# EAGLE board IntegratedSensor (EAGLE 6.3)
MenloSensor1
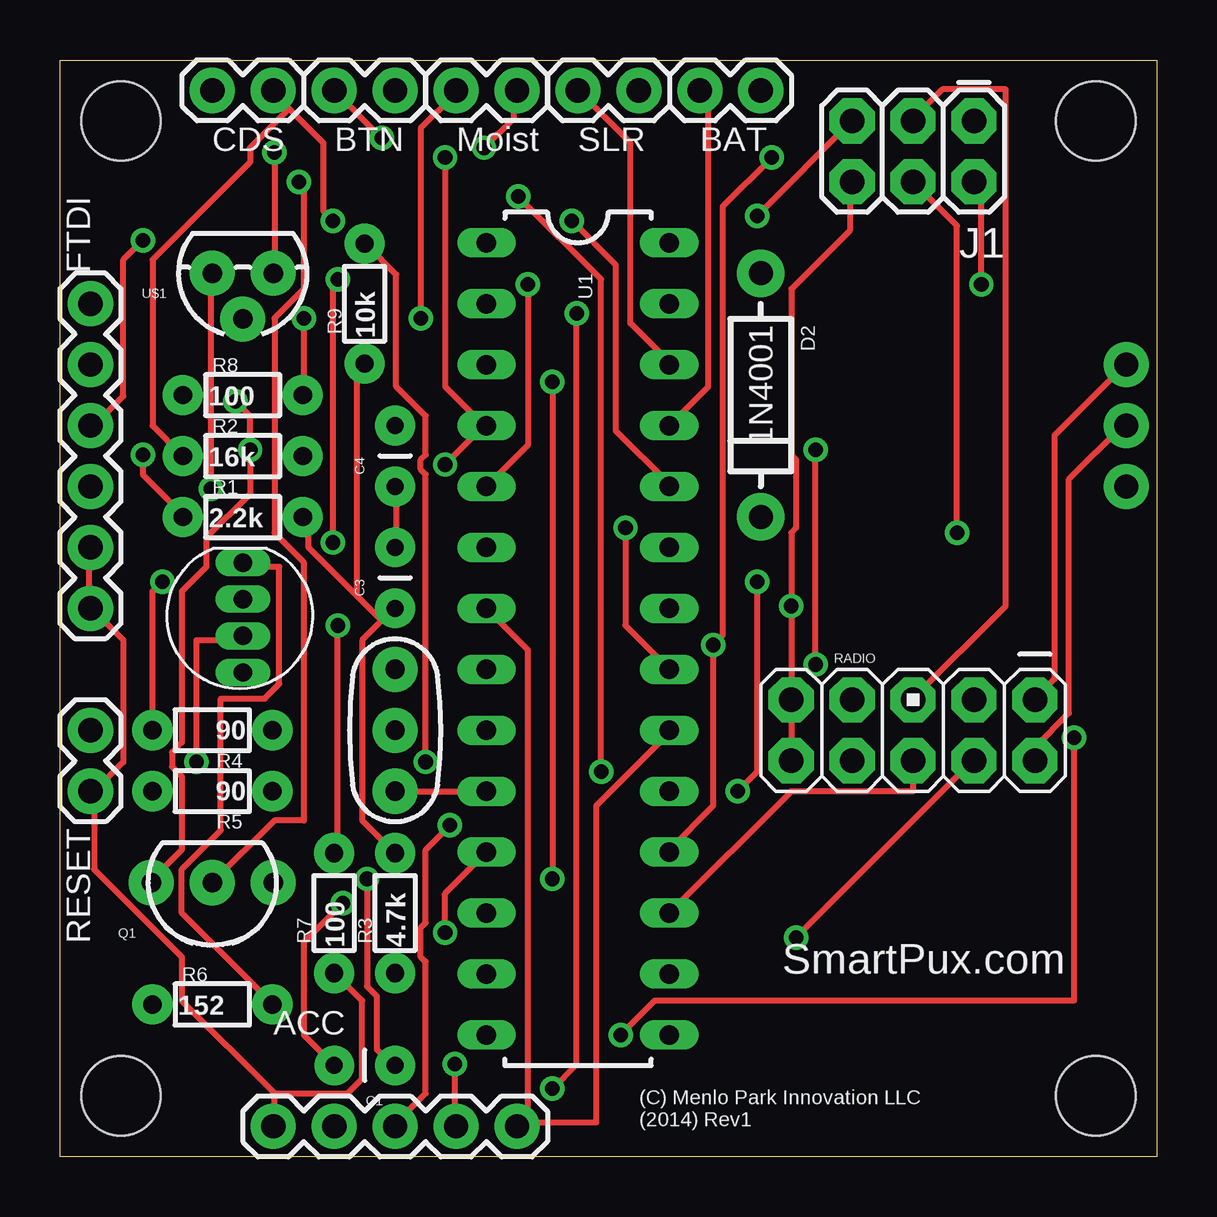
[diagram p0: board, top side]
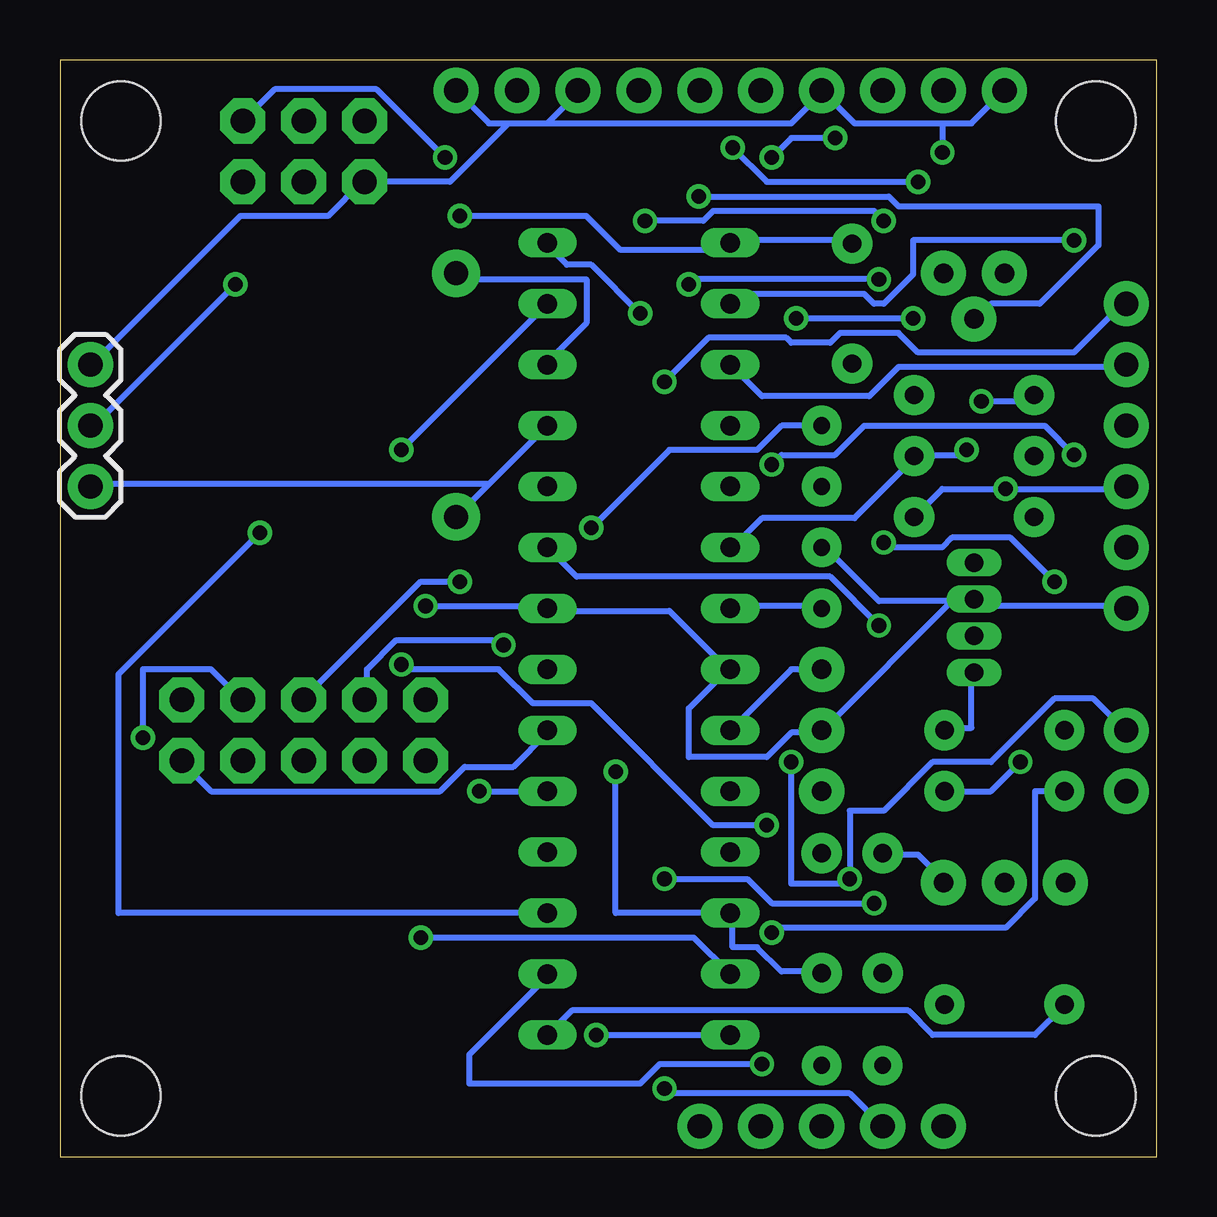
[diagram p1: board, bottom side, seen from below]

Size 45.72 x 45.72 mm. Coordinates in mm from the lower left corner, seen from the top.
Outline: 0,0 0,45.72 45.72,45.72 45.72,0 0,0
Copper layers (1*16): Top 0.035mm / dielectric 1.5mm / Bottom 0.035mm
Design rules "default *": minimum track width 10mil, minimum drill 24mil, track to track 8mil, track to pad 8mil, pad to pad 8mil, via to via 8mil, smd to smd 8mil, copper to edge 40mil, drill to drill 8mil, minimum pad ring 0mil, minimum via ring 8mil, stop-mask expansion 4mil, vias tented up to drill 0mil, thermal gap 10mil

## Footprints (pad centres in the part's own frame; a part is rotated, then mirrored left to right if it is on the bottom)
1X05 = drill 1.016 pad 1.88: 1 0,0; 2 2.54,0; 3 5.08,0; 4 7.62,0; 5 10.16,0
1X02 = drill 1.016 pad 1.88: 1 0,0; 2 2.54,0
CAP-PTH-SMALL = drill 0.7 pad 1.651: 1 0,0; 2 2.54,0
1X03 = drill 1.016 pad 1.88: 1 0,0; 2 2.54,0; 3 5.08,0
LED-RGB-THRU = drill 0.762 pad 0.889 long: 1 1.905,0; 2 0.381,0; 3 -1.143,0; 4 -2.667,0
DIODE-1N4001 = drill 1 pad 1.981: A -5.08,0; C 5.08,0
1X06 = drill 1.016 pad 1.88: 1 0,0; 2 2.54,0; 3 5.08,0; 4 7.62,0; 5 10.16,0; 6 12.7,0
2X3 = drill 1.016 pad 1.88 octagon: 1 0,0; 2 0,2.54; 3 2.54,0; 4 2.54,2.54; 5 5.08,0; 6 5.08,2.54
TO-92-AMMO = drill 0.813 pad 1.88: 1 -2.54,0; 2 0,0; 3 2.54,0
1/6W-RES = drill 0.762 pad 1.676: 1 -2.5,0; 2 2.5,0
AVR_ICSP = drill 1.016 pad 1.88 octagon: 1 -1.27,5.08; 2 1.27,5.08; 3 -1.27,2.54; 4 1.27,2.54; 5 -1.27,0; 6 1.27,0; 7 -1.27,-2.54; 8 1.27,-2.54; 9 -1.27,-5.08; 10 1.27,-5.08
STAND-OFF = hole 3.302: 0,0
DIL28-3 = drill 0.813 long: 1 -16.51,-3.81; 2 -13.97,-3.81; 3 -11.43,-3.81; 4 -8.89,-3.81; 5 -6.35,-3.81; 6 -3.81,-3.81; 7 -1.27,-3.81; 8 1.27,-3.81; 9 3.81,-3.81; 10 6.35,-3.81; 11 8.89,-3.81; 12 11.43,-3.81; 13 13.97,-3.81; 14 16.51,-3.81; 15 16.51,3.81; 16 13.97,3.81; 17 11.43,3.81; 18 8.89,3.81; 19 6.35,3.81; 20 3.81,3.81; 21 1.27,3.81; 22 -1.27,3.81; 23 -3.81,3.81; 24 -6.35,3.81; 25 -8.89,3.81; 26 -11.43,3.81; 27 -13.97,3.81; 28 -16.51,3.81
TO-92 = drill 0.813 pad 1.88: 1 -1.27,0; 2 0,1.905; 3 1.27,0
RESONATOR-PTH = drill 0.8 pad 1.88: 1 -2.54,0; 2 0,0; 3 2.54,0

## Placement (x,y rotation side)
ACC  [1X05]  8.89,1.27 0 top
BAT  [1X02]  26.67,44.45 0 top
BTN  [1X02]  11.43,44.45 0 top
C1  0.1uf  [CAP-PTH-SMALL]  13.97,3.81 180 top
C3  0.1uf  [CAP-PTH-SMALL]  13.97,22.86 90 top
C4  0.1uf  [CAP-PTH-SMALL]  13.97,27.94 90 top
CDS  [1X02]  6.35,44.45 0 top
CONVERTER  3pin  [1X03]  44.45,27.94 90 bottom
D1  LED-RGB-CC-THRUCLEAR  [LED-RGB-THRU]  7.62,22.86 90 top
D2  1N4001  [DIODE-1N4001]  29.21,31.75 270 top
FTDI  [1X06]  1.27,35.56 270 top
J1  AVR_SPI_PRG_6PTH  [2X3]  38.1,43.18 180 top
MOIST  2pin  [1X02]  19.05,44.45 180 top
Q1  2N2222A  [TO-92-AMMO]  6.35,11.43 180 top
R1  2.2k  [1/6W-RES]  7.62,26.67 0 top
R2  16k  [1/6W-RES]  7.62,29.21 0 top
R3  4.7k  [1/6W-RES]  13.97,10.16 90 top
R4  90  [1/6W-RES]  6.35,17.78 180 top
R5  90  [1/6W-RES]  6.35,15.24 180 top
R6  152  [1/6W-RES]  6.35,6.35 0 top
R7  100  [1/6W-RES]  11.43,10.16 90 top
R8  100  [1/6W-RES]  7.62,31.75 0 top
R9  10k  [1/6W-RES]  12.7,35.56 90 top
RADIO  M05X2PTH  [AVR_ICSP]  35.56,17.78 270 top
RESET  0  [1X02]  1.27,17.78 270 top
SLR  [1X02]  21.59,44.45 0 top
STANDOFF1  STAND-OFF  [STAND-OFF]  43.18,43.18 0 top
STANDOFF2  STAND-OFF  [STAND-OFF]  2.54,43.18 0 top
STANDOFF3  STAND-OFF  [STAND-OFF]  2.54,2.54 0 top
STANDOFF4  STAND-OFF  [STAND-OFF]  43.18,2.54 0 top
U1  ATMEGA328P_PDIP  [DIL28-3]  21.59,21.59 270 top
U$1  TEMPERATURE-SENSOR  [TO-92]  7.62,36.83 180 top
Y2  8Mhz  [RESONATOR-PTH]  13.97,17.78 270 top

## Library data of the parts
ACC BAT BTN CDS CONVERTER FTDI J1 MOIST RADIO RESET SLR = SparkFun-Connectors
C1 C3 C4 = SparkFun-Capacitors
D1 = SparkFun-LED-MenloFix; PROD_ID: DIO-08418
D2 Q1 = SparkFun-DiscreteSemi
R1-R9 = SparkFun-Resistors
STANDOFF1-STANDOFF4 = SparkFun-Electromechanical
U1 = SparkFun-DigitalIC
U$1 = SparkFun-Sensors; PARTNAME: DS18B20
Y2 = SparkFun-FreqCtrl

## Nets
A0_MOISTUREINPUT: Q1.1 R7.2 U1.23
A1_LIGHTINPUT: CDS.2 R2.1 U1.24
A4_SDA: ACC.3 U1.27
A5_SCL: ACC.2 U1.28
BAT: BAT.1 CONVERTER.1 D2.C U1.25
CE_RADIO: RADIO.3 U1.14
CSN_RADIO: RADIO.4 U1.13
DIO3_BLUE: R4.2 U1.5
DIO4_SENSOR_POWER: Q1.3 R2.2 R8.1 U1.6
DIO5_GREEN: R5.2 U1.11
DIO6_TEMP: R3.1 U1.12 U$1.2
DIO9_RED: R6.1 U1.15
DIO10_SS: ACC.4 U1.16
GND: ACC.1 BAT.2 BTN.2 C3.2 C4.1 CDS.1 CONVERTER.3 D1.2 FTDI.5 FTDI.6 J1.6 R7.1 RADIO.1 RADIO.9 RADIO.10 RESET.2 SLR.2 U1.8 U1.22 U$1.1 Y2.2
IRQ: BTN.1 R1.1 U1.4
MISO: J1.1 RADIO.7 U1.18
MOSI: J1.4 RADIO.6 U1.17
N$1: D1.4 R4.1
N$2: D1.3 R5.1
N$3: D1.1 R6.2
N$5: U1.9 Y2.1
N$6: U1.10 Y2.3
N$8: C4.2 U1.21
PROBE1: MOIST.1 Q1.2
PROBE2: MOIST.2 R8.2
RESET: C1.1 J1.5 R9.2 RESET.1 U1.1
RTS#: C1.2 FTDI.1
RXD: FTDI.3 U1.2
SCK: J1.3 RADIO.5 U1.19
SOLAR_PLUS: D2.A SLR.1 U1.26
TXD: FTDI.2 U1.3
VCC: ACC.5 C3.1 CONVERTER.2 FTDI.4 J1.2 R1.2 R3.2 R9.1 RADIO.2 U1.7 U1.20 U$1.3

## Tracks (layer width: path | path; a pad name or v marks a point on that pad's centre or on a via)
A0_MOISTUREINPUT  (via drill 0.61)
  Top 0.254: v11.58,22.15 11.58,12.8 R7.2
  Bottom 0.254: U1.23 24.18,24.18 13.61,24.18 v11.58,22.15 | Q1.1 8.94,11.58 9.96,12.6 11.38,12.6 R7.2
A1_LIGHTINPUT  (via drill 0.61)
  Top 0.254: v21.34,39.01 23.16,37.19 23.16,30.28 25.4,28.04 U1.24 | v11.38,39.01 10.97,39.42 10.97,42.27 9.55,43.69 | 9.55,43.69 8.94,44.3 CDS.2 | 9.55,43.69 7.92,42.06 7.92,41.45 3.86,37.39 3.86,30.48 5.08,29.26 R2.1
  Bottom 0.254: v21.34,39.01 18.9,39.01 18.49,39.42 11.79,39.42 v11.38,39.01
A4_SDA  (via drill 0.61)
  Top 0.254: v31.5,20.52 v31.5,29.46 | v16.26,13.82 15.24,12.8 15.24,9.75 15.04,9.55 15.04,8.33 15.24,8.13 15.24,2.64 14.02,1.42 ACC.3
  Bottom 0.254: v31.5,29.46 U1.27 | v31.5,20.52 31.29,20.32 27.43,20.32 26.01,18.9 23.57,18.9 18.49,13.82 v16.26,13.82
A5_SCL  (via drill 0.61)
  Top 0.254: v21.54,35.15 21.54,3.86 v20.52,2.85
  Bottom 0.254: v21.54,35.15 23.57,37.19 24.59,37.19 25.4,38 U1.28 | v20.52,2.85 20.32,2.64 12.8,2.64 ACC.2
BAT
  Top 0.254: BAT.1 27.03,44.09 27.03,32.11 U1.25
  Bottom 0.254: D2.C 27.84,28.04 | 27.84,28.04 U1.25 | 27.84,28.04 44.3,28.04 CONVERTER.1
CE_RADIO  (via drill 0.61)
  Top 0.254: v23.37,5.08 24.79,6.5 42.27,6.5 v42.27,17.48
  Bottom 0.254: v23.37,5.08 U1.14 | v42.27,17.48 42.27,20.32 39.42,20.32 38.2,19.1 RADIO.3
CSN_RADIO  (via drill 0.61)
  Top 0.254: v30.68,9.14 38,16.46 RADIO.4
  Bottom 0.254: U1.13 19.3,9.14 v30.68,9.14
DIO3_BLUE  (via drill 0.61)
  Top 0.254: U1.5 19.51,29.67 v19.51,36.37 | v11.58,36.58 11.38,36.37 v11.38,25.6 | v4.27,23.98 3.86,23.57 3.86,17.88 R4.2
  Bottom 0.254: v19.51,36.37 19.3,36.58 v11.58,36.58 | v11.38,25.6 11.18,25.4 8.94,25.4 8.53,25.81 6.1,25.81 v4.27,23.98
DIO4_SENSOR_POWER  (via drill 0.61)
  Top 0.254: v7.32,31.5 7.92,30.89 v7.92,29.46 7.92,27.64 6.1,25.81 6.1,24.59 5.08,23.57 5.08,17.27 4.67,16.87 4.67,16.26 5.08,15.85 5.08,12.8 3.86,11.58 Q1.3
  Bottom 0.254: U1.6 17.68,25.4 16.46,26.62 12.6,26.62 10.16,29.06 R2.2 9.96,29.26 8.13,29.26 v7.92,29.46 | v7.32,31.5 5.49,31.5 5.28,31.7 R8.1
DIO5_GREEN  (via drill 0.61)
  Top 0.254: U1.11 16.05,10.97 v16.05,9.35
  Bottom 0.254: v16.05,9.35 15.85,9.55 6.3,9.55 5.08,10.77 5.08,15.24 R5.2
DIO6_TEMP  (via drill 0.61)
  Top 0.254: v19.1,40.03 22.55,36.58 v22.55,16.05
  Bottom 0.254: R3.1 14.02,7.72 15.65,7.72 16.66,8.74 17.68,8.74 17.68,10.16 U1.12 22.55,10.16 v22.55,16.05 | v19.1,40.03 11.18,40.03 10.77,39.62 2.44,39.62 2.44,38 4.88,35.56 6.91,35.56 7.52,34.95 U$1.2
DIO9_RED
  Bottom 0.254: U1.15 24.38,6.1 10.36,6.1 9.35,5.08 5.08,5.08 3.86,6.3 R6.1
DIO10_SS  (via drill 0.61)
  Top 0.254: v16.46,3.86 16.46,1.42 ACC.4
  Bottom 0.254: v16.46,3.86 20.73,3.86 21.54,3.05 28.65,3.05 28.65,4.27 25.4,7.52 U1.16
GND  (via drill 0.61)
  Top 0.254: 8.94,2.64 11.99,2.64 12.6,3.25 12.6,6.5 11.58,7.52 R7.1 | 8.94,2.64 8.94,1.42 ACC.1 | C3.2 14.02,25.4 14.02,27.84 C4.1 | 1.42,15.24 2.64,16.46 2.64,21.54 1.42,22.76 FTDI.6 1.22,22.96 1.22,25.4 FTDI.5 | 8.94,2.64 5.08,6.5 5.08,8.33 1.42,11.99 1.42,15.24 | 1.42,15.24 RESET.2 | RADIO.1 40.64,19.1 41.45,19.91 41.45,30.07 44.3,32.92 CONVERTER.3 | v8.94,41.86 8.94,36.98 U$1.1 | RADIO.10 RADIO.9 v30.48,22.96 30.48,26.01 30.68,26.21 30.68,29.06 30.48,29.26 30.48,36.17 32.92,38.61 32.92,40.64 J1.6
  Bottom 0.254: 17.88,20.32 20.32,22.76 25.4,22.76 U1.22 25.4,22.96 v30.48,22.96 | D1.2 7.52,23.16 7.32,22.96 1.42,22.96 FTDI.6 | 8.53,23.16 13.82,17.88 Y2.2 14.02,17.68 15.24,17.68 16.26,16.66 19.51,16.66 19.51,18.69 17.88,20.32 | 8.53,23.16 7.72,23.16 D1.2 | 8.53,23.16 11.58,23.16 13.82,25.4 C3.2 | 8.53,23.16 D1.2 | 17.88,20.32 U1.8 | CDS.1 7.72,43.08 8.94,43.08 | 8.94,43.08 12.6,43.08 BTN.2 14.02,44.3 15.24,43.08 25.4,43.08 | 8.94,43.08 v8.94,41.86 | 25.4,43.08 24.18,44.3 SLR.2 | 27.03,43.08 27.84,43.08 BAT.2 | 27.03,43.08 25.4,43.08 | 27.03,43.08 29.46,40.64 J1.6 33.12,40.64 34.54,39.22 38.2,39.22 44.3,33.12 CONVERTER.3
IRQ  (via drill 0.61)
  Top 0.254: 17.68,30.48 16.05,32.11 v16.05,41.66 | BTN.1 v13.41,42.47 | v3.45,29.26 3.45,28.45 5.08,26.82 R1.1 | 17.68,30.48 v16.05,28.85 | 17.68,30.48 U1.4
  Bottom 0.254: v16.05,41.66 15.24,42.47 v13.41,42.47 | v3.45,29.26 4.67,30.48 12.19,30.48 13.41,29.26 15.65,29.26 v16.05,28.85
MISO  (via drill 0.61)
  Top 0.254: U1.18 25.4,12.8 27.23,14.63 v27.23,21.34 27.64,21.74 27.64,39.62 v29.67,41.66
  Bottom 0.254: v27.23,21.34 27.43,21.54 31.7,21.54 32.92,20.32 32.92,19.1 RADIO.7 | J1.1 36.78,44.5 32.51,44.5 v29.67,41.66
MOSI  (via drill 0.61)
  Top 0.254: U1.17 30.48,15.24 35.56,15.24 RADIO.6 | J1.4 37.39,38.81 v37.39,26.01
  Bottom 0.254: v37.39,26.01 43.28,20.12 43.28,10.16 U1.17
N$1
  Bottom 0.254: D1.4 7.72,20.12 7.72,17.88 8.74,17.88 R4.1
N$2  (via drill 0.61)
  Top 0.254: v5.69,16.46 5.69,21.54 7.52,21.54 D1.3
  Bottom 0.254: v5.69,16.46 6.91,15.24 R5.1
N$3
  Top 0.254: D1.1 7.72,24.59 9.14,24.59 9.14,19.71 8.53,19.1 6.71,19.1 6.71,13.61 5.08,11.99 5.08,10.16 8.74,6.5 R6.2
N$5
  Bottom 0.254: U1.9 15.24,20.32 Y2.1
N$6
  Top 0.254: Y2.3 U1.10
N$8  (via drill 0.61)
  Top 0.254: U1.21 23.57,22.15 v23.57,26.21
  Bottom 0.254: v23.57,26.21 20.32,29.46 16.66,29.46 15.65,30.48 C4.2
PROBE1  (via drill 0.61)
  Top 0.254: Q1.2 8.94,14.02 10.16,14.02 10.16,24.79 8.94,26.01 8.94,34.95 10.16,36.17 10.16,40.44 v9.96,40.64 | v17.68,42.06 18.9,43.28 18.9,44.3 MOIST.1
  Bottom 0.254: v9.96,40.64 16.26,40.64 v17.68,42.06
PROBE2  (via drill 0.61)
  Top 0.254: v10.16,34.95 10.16,31.9 R8.2 | v15.04,34.95 15.04,42.88 16.46,44.3 MOIST.2
  Bottom 0.254: v15.04,34.95 v10.16,34.95
RESET  (via drill 0.61)
  Top 0.254: v29.06,39.22 J1.5 | v12.8,11.58 12.8,7.11 13.21,6.71 13.21,4.47 13.82,3.86 C1.1 | v15.24,16.46 15.24,28.45 15.04,28.65 15.04,29.06 15.24,29.26 15.24,30.89 14.02,32.11 14.02,36.78 12.8,38 R9.2
  Bottom 0.254: R9.2 12.8,38.2 17.68,38.2 U1.1 18.09,37.8 22.35,37.8 23.77,39.22 v29.06,39.22 | RESET.1 1.42,17.88 2.64,19.1 4.27,19.1 6.91,16.46 9.35,16.46 11.38,14.43 12.8,14.43 v12.8,11.58 13.01,11.38 15.24,11.38 v15.24,16.46
RTS#  (via drill 0.61)
  Top 0.254: C1.2 10.16,5.08 10.16,8.94 v11.79,10.57 | v20.52,32.31 v20.52,11.58
  Bottom 0.254: v11.79,10.57 16.05,10.57 17.07,11.58 v20.52,11.58 | v20.52,32.31 18.69,34.14 15.44,34.14 15.24,33.93 13.61,33.93 13.21,34.34 10.77,34.34 9.96,33.53 3.45,33.53 1.42,35.56 FTDI.1
RXD  (via drill 0.61)
  Top 0.254: v3.45,38.2 2.64,37.39 2.64,31.7 1.42,30.48 FTDI.3
  Bottom 0.254: v3.45,38.2 10.16,38.2 10.16,36.78 11.38,35.56 11.79,35.56 12.19,35.97 17.27,35.97 17.68,35.56 U1.2
SCK  (via drill 0.61)
  Top 0.254: v28.25,15.24 29.06,16.05 v29.06,23.98 | J1.3 35.56,43.28 36.78,44.5 39.42,44.5 39.42,22.96 35.56,19.1 RADIO.5
  Bottom 0.254: v28.25,15.24 U1.19 | v29.06,23.98 30.68,23.98 35.56,19.1 RADIO.5
SOLAR_PLUS
  Top 0.254: SLR.1 23.77,42.27 23.77,34.75 25.4,33.12 U1.26
  Bottom 0.254: U1.26 25.4,33.12 23.77,34.75 23.77,36.58 28.85,36.58 29.06,36.78 D2.A
TXD
  Bottom 0.254: U1.3 16.46,31.7 11.99,31.7 10.77,32.92 1.42,32.92 FTDI.2
VCC  (via drill 0.61)
  Top 0.254: 13.41,22.35 13.82,22.76 C3.1 13.41,22.35 | 13.41,22.35 12.6,21.54 12.6,14.02 13.82,12.8 R3.2 | 13.41,22.35 12.39,23.37 | 12.39,23.37 10.36,25.4 10.36,26.42 10.16,26.62 R1.2 | 12.39,23.37 12.39,32.72 12.6,32.92 R9.1 | v6.3,27.84 6.3,36.78 U$1.3 | 19.51,1.42 22.35,1.42 22.35,14.63 25.4,17.68 U1.20 | 19.51,1.42 19.1,1.42 ACC.5 19.51,1.42 | RADIO.2 40.64,17.07 42.06,18.49 42.06,28.25 44.3,30.48 CONVERTER.2 | v38.41,36.37 38.41,40.44 38.2,40.64 J1.2 | U1.7 19.51,21.13 19.51,1.42
  Bottom 0.254: U1.7 17.68,22.96 14.02,22.96 C3.1 | FTDI.4 1.42,27.84 v6.3,27.84 8.94,27.84 9.96,26.82 R1.2 | U1.20 25.4,17.68 26.82,16.26 28.85,16.26 29.87,15.24 39.42,15.24 40.64,16.46 RADIO.2 | v38.41,36.37 44.3,30.48 CONVERTER.2

## Text on the board
tPlace: CDS | BTN | Moist | SLR | BAT | FTDI | RESET | SmartPux.com | ACC | (C) Menlo Park Innovation LLC / (2014) Rev1